# Altium PCB 电源板.PcbDoc
Units mil, origin at the board's own origin, x right, y up, seen from the top; angles counter-clockwise.
Board outline 3495 x 1305 mil, 2 copper layers (Top Layer, Bottom Layer); 24 components, 9 nets, 56 pads, 79 vias.
Unrouted connection lines stored in the file: 15.
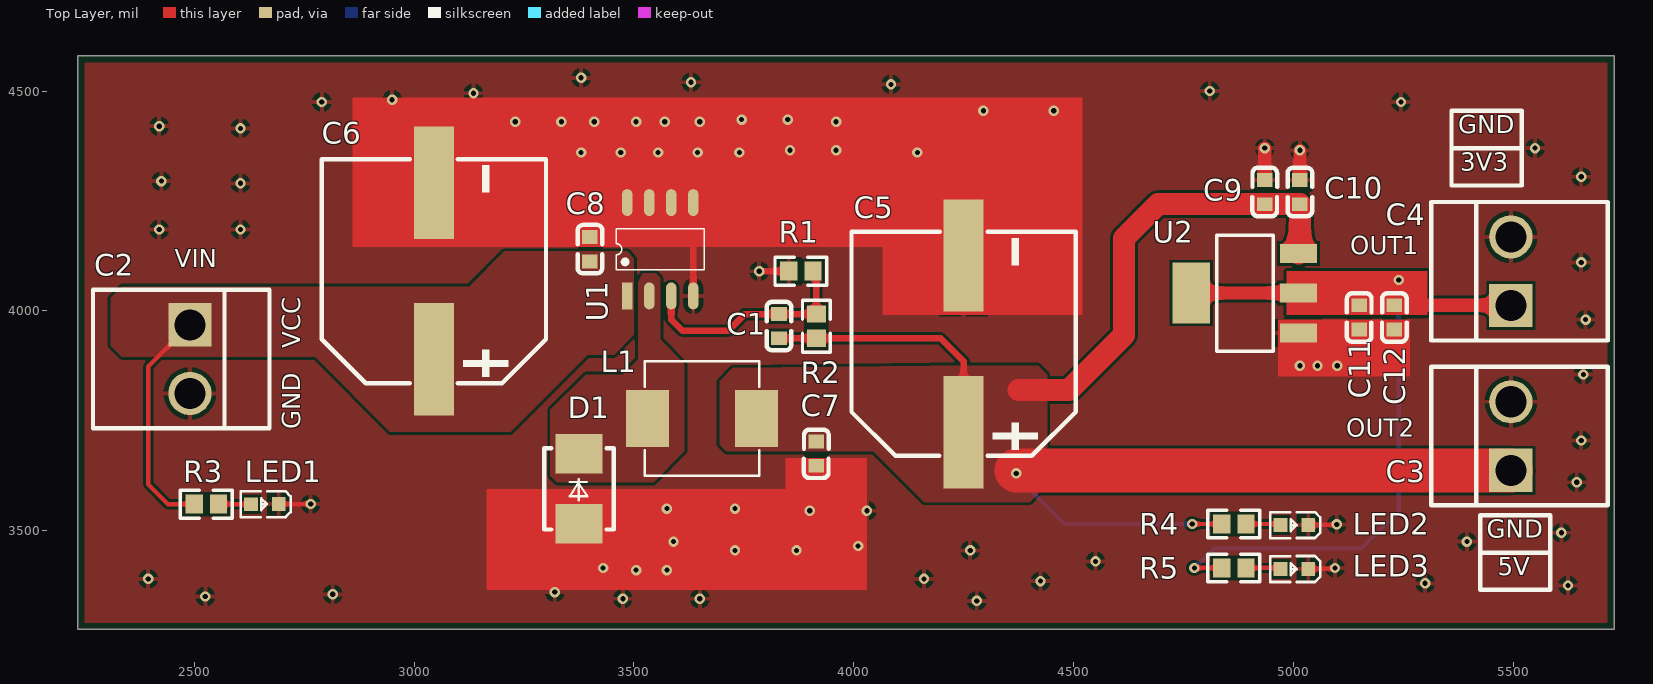
[diagram p0: Top Layer view]
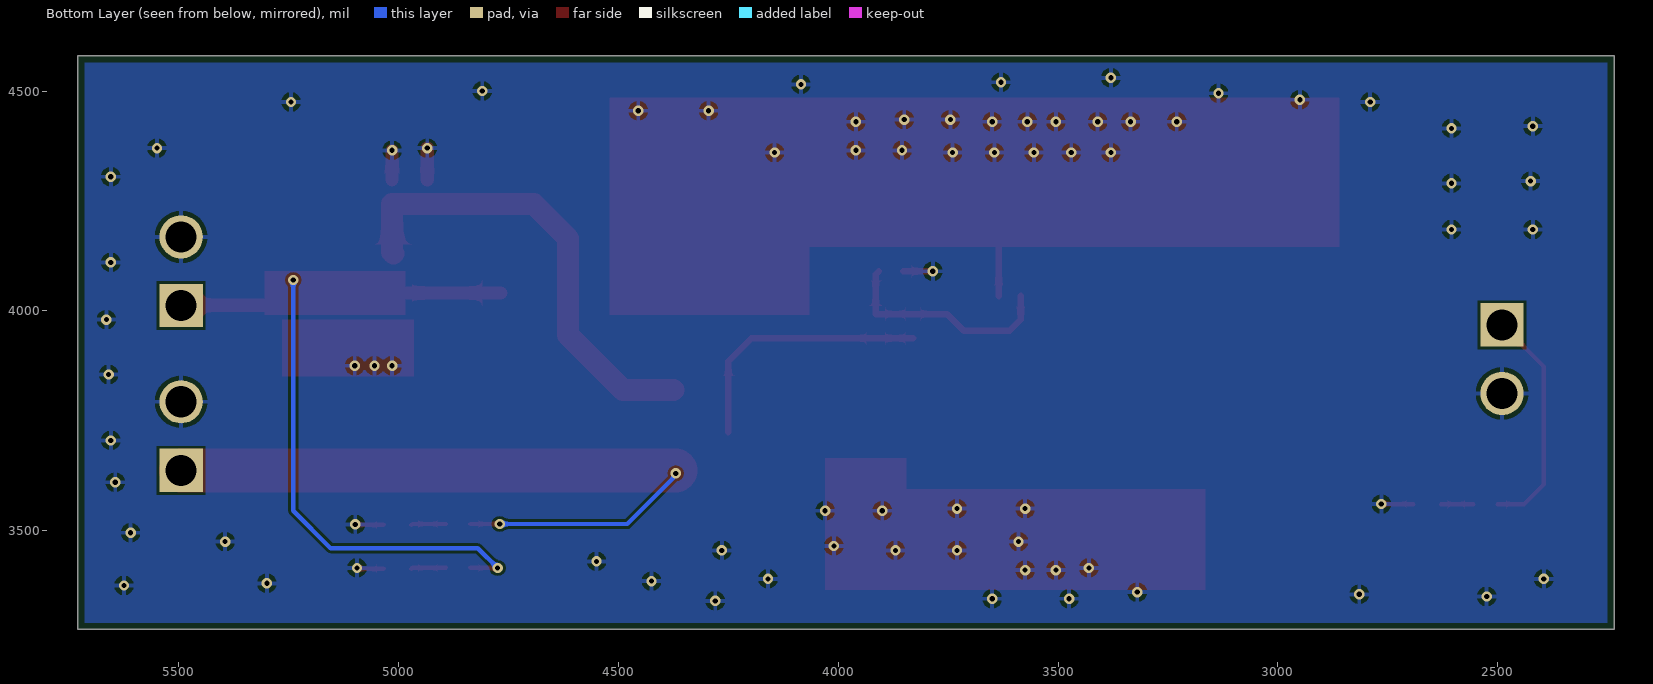
[diagram p1: Bottom Layer view, seen from below]

## Layer stack, top to bottom
Top Solder: solder mask 0.4, Solder Resist, Dk 3.5
Top Layer: signal copper 1.4
Dielectric 1: dielectric 12.6, FR-4, Dk 4.8
Bottom Layer: signal copper 1.4
Bottom Solder: solder mask 0.4, Solder Resist, Dk 3.5

## Board outline
2235,3275 5730,3275 5730,4580 2235,4580

## Design rules (kind name [scope] priority, off if disabled: settings)
BoardOutlineClearance [All] p1: gap=10 ignorepadtopadclearanceinfootprint=FALSE except(0: Arc-SplitContinuation Track-SplitContinuation SMDPad-SplitContinuation THPad-SplitContinuation Via-SplitContinuation Fill-SplitContinuation Poly-SplitContinuation Region-SplitContinuation Text-SplitContinuation; 15: Poly-OutlineEdge)
Clearance [All] p1: gap=6 ignorepadtopadclearanceinfootprint=FALSE
PolygonConnect PolygonConnect_PWR [InNetClass('pwr')] p1: connectstyle=Direct reliefconductorwidth=10 reliefentries=4 polygonreliefangle="90 Angle" airgapwidth=10
PolygonConnect [All] p2: connectstyle=Relief reliefconductorwidth=10 reliefentries=4 polygonreliefangle="90 Angle" airgapwidth=10
RoutingVias [All] p1: holewidth=28 width=50 viastyle="Through Hole" minholewidth=28 minwidth=50 maxholewidth=28 maxwidth=50
SolderMaskExpansion [All] p1: expansion=4
Width [All] p1: maxlimit=100 minlimit=10 preferedwidth=10 minimp=50.000000 maximp=50.000000 favimp=50.000000
30 further rules are at their usual default settings.

## Classes and differential pairs
net class pwr: 3V3 +5 NetD1_1 VCC

## Components (designator, comment, footprint, x,y, rotation, side; value= is the part's Value field where it differs from the comment)
C1 "3.3nF" C0603 3830,3965 r270 top
C2 "CON2" CONN-TH_2P-P3.96_3961S-2P 2490,3890 r270 top
C3 "CON2" CONN-TH_2P-P3.96_3961S-2P 5495,3715 r90 top
C4 "CON2" CONN-TH_2P-P3.96_3961S-2P 5495,4090 r90 top
C5 "470uF/50V" CAP-SMD_BD12.5-L13.0-W13.0-LS13.7-FD 4250,3925 r90 top
C6 "470uF/50V" CAP-SMD_BD12.5-L13.0-W13.0-LS13.7-FD 3045,4090 r90 top
C7 "100nF" C0603 3915,3675 r90 top
C8 "105" C0603 3400,4140 r270 top
C9 "10u" C0603 4935,4270 r270 top
C10 "0.1u" C0603 5015,4270 r270 top
C11 "10u" C0603 5150,3985 r90 top
C12 "0.1u" C0603 5230,3985 r90 top
D1 "SS34_C330487" SMB_L4.6-W3.6-LS5.3-RD 3375,3595 r270 top
L1 "47uH/2A" IND-SMD_L7.1-W6.6 3655,3755 r180 top
LED1 "" LED0603-RD 2662.44,3560 r180 top
LED2 "" LED0603-RD 5004.65,3512.59 r180 top
LED3 "" LED0603-RD 5004.65,3412.53 r180 top
R1 "1K" 0603 3880,4090 r0 top
R2 "3.1K" 0603 3915,3965 r270 top
R3 "20k" 0603 2527.44,3560 r0 top
R4 "10K" 0603 4865,3515 r0 top
R5 "4.7K" 0603 4865,3415 r0 top
U1 "XL1509-ADJ" SOP8 3560,4140 r0 top
U2 "AMS1117-3.3" SOT-223_L6.5-W3.5-P2.30-LS7.0-BR 4890,4040 r0 top

## Footprints (in the part's own frame and the unit in brackets; to place one, negate y for a bottom-side part, rotate by r counter-clockwise, add the part's x,y. Pads: shape width x height; smd on the part's side, far side on the other; paste and mask are expansions set on the pad)
0603 [mm]
  rect 1x1.1 smd: 1(-0.7,0) 2(0.7,0)
  silkscreen extent -1.5,-0.8 1.5,0.8
C0603 [mm]
  rect 0.8x0.9 smd: 1(-0.7,0) 2(0.7,0)
  silkscreen extent -1.41,-0.71 1.39,0.72
CAP-SMD_BD12.5-L13.0-W13.0-LS13.7-FD [mm]
  rect 6.5x2.3 smd: 1(-5.1,0) 2(5.1,0)
  silkscreen extent -6.48,-6.48 6.48,6.48
CONN-TH_2P-P3.96_3961S-2P [mm]
  rect 2.5x2.5 hole 1.8: 1(-1.981,0)
  round 2.5 hole 1.8: 2(1.981,0)
  silkscreen extent -4,-5.6 4,4.6
IND-SMD_L7.1-W6.6 [mm]
  rect 2.474x3.32 smd: 1(3.153,0) 2(-3.153,0)
  silkscreen extent -3.3,-3.3 3.3,3.3
LED0603-RD [mm]
  rect 0.8x0.8 smd: 1(-0.75,-0.009) 2(0.849,-0.002)
  silkscreen extent -1.44,-0.75 1.44,0.75
SMB_L4.6-W3.6-LS5.3-RD [mm]
  rect 2.29x2.72 smd: 1(-2.025,0) 2(2.025,0)
  silkscreen extent -2.35,-2 2.35,2
SOP8 [mil]
  rect 24x61 smd: 1(-75,-106.3)
  oval 24x61 smd: 2(-25,-106.3) 3(25,-106.3) 4(75,-106.3) 5(75,106.3) 6(25,106.3) 7(-25,106.3) 8(-75,106.3)
  silkscreen extent -100,-47 100,47
SOT-223_L6.5-W3.5-P2.30-LS7.0-BR [mil]
  rect 85x43 smd: 1(122,-90.5) 2(122,0.5) 3(122,90.5)
  rect 85x138 smd: 4(-122,0.5)
  silkscreen extent -64,-132 64,132

## Part data
C1: BOM_Manufacturer="Guangdong Fenghua Advanced Tech", BOM_Manufacturer Part=0603CG332J500NT, BOM_Supplier=LCSC, BOM_Supplier Part=C190576, Contributor=LCSC, nameAlias=Capacitance, spicePre=C, spiceSymbolName=0603CG332J500NT
C5 C6: library part 470uF/35V, LatestRevisionDate=17-Jul-2002, LatestRevisionNote="Re-released for DXP Platform.", PackageDescription="Polarized Capacitor (Radial); 2 Leads", PackageReference=RB7.6-15, Published=8-Jun-2000, Publisher="Altium Limited"
C7: BOM_Manufacturer=WTC, BOM_Manufacturer Part=0603B104K160, BOM_Supplier=LCSC, BOM_Supplier Part=C80516, nameAlias=Capacitance, spicePre=C, spiceSymbolName=0603B104K160
C8: library part 100nF, BOM_Manufacturer=WTC, BOM_Manufacturer Part=0603B104K160, BOM_Supplier=LCSC, BOM_Supplier Part=C80516, nameAlias=Capacitance, spicePre=C, spiceSymbolName=0603B104K160
D1: BOM_Manufacturer=LGE, BOM_Manufacturer Part=SS34, BOM_Supplier=LCSC, BOM_Supplier Part=C330487, Contributor=LCSC, spicePre=D, spiceSymbolName=SS34_C330487
LED1 LED2 LED3: library part TJ-S1608CY6T5ALC6B-A5
R1 R2: BOM_Manufacturer=YAGEO, BOM_Manufacturer Part=RC0603FR-071KL, BOM_Supplier=LCSC, BOM_Supplier Part=C22548, nameAlias="Resistance (Ohms)", spicePre=R, spiceSymbolName=RC0603FR-071KL
R3 R4 R5: library part 3.1K, BOM_Manufacturer=YAGEO, BOM_Manufacturer Part=RC0603FR-071KL, BOM_Supplier=LCSC, BOM_Supplier Part=C22548, nameAlias="Resistance (Ohms)", spicePre=R, spiceSymbolName=RC0603FR-071KL
U2: BOM_LCSC Assembly=Yes, BOM_Manufacturer=AMS, BOM_Manufacturer Part=AMS1117-3.3, BOM_Supplier=LCSC, BOM_Supplier Part=C6186, Contributor=haohan123, image=//image.lceda.cn/szlcsc/C6186.jpg, SMT Type=Basic, sourceId=dwIGgezVh, spicePre=U, spiceSymbolName=AMS1117-3.3, timeStamp=1476261164
C9 C10 C11 C12: Contributor=LCEDA_Lib, nameAlias=Value(F), spicePre=C, spiceSymbolName=C_0603_US
L1: Code_IEC=1005, Code_JEITA=0402, LatestRevisionDate=29-May-2009, LatestRevisionNote="IPC-7351 Footprint Added.", PackageDescription="Chip Inductor", PackageReference=0402-A, Publisher="Altium Limited"
U1: Contributor=XYCWJ, spicePre=U, spiceSymbolName=XL1509-ADJ

## Via types
v1: diameter 23.62, hole 11.81, Top Layer to Bottom Layer, 79 vias

## Nets (pads, with @x,y where several pads share a name; then routed paths per layer and width w, separated by ;. In a path a pad name is that pad's centre, name@x,y a point inside that pad or via, vN(x,y) a via of type N, cw(c..) or ccw(c..) an arc to the next point about the centre after c; other vN are vias at no path point)
3V3: C4.1 C11.2 C12.2 R5.1 U2.2 U2.4 | length 1846.2
  Top Layer w10: v1(4775,3415) R5.1
  Top Layer w30: U2.4 U2.2 5122.06,4040.5 5147.28,4015.27 5147.28,4013.3 5148.03,4012.55 C11.2 C12.2 5494.44,4012.55 C4.1
  Bottom Layer w10: v1(4775,3415) 4820,3460 5155,3460 5240,3545 v1(5240,4070)
+5: C1.2 C3.1 C5.1 C7.2 C9.2 C10.2 L1.2 R2.2 R4.1 U2.3 | length 3302.6
  Top Layer w10: v1(4770,3515) R4.1
  Top Layer w15: C1.2 R2.2 4197.56,3937.44 4250,3885 C5.1
  Top Layer w50: 4375,3820 4490,3820 4615,3945 4615,4165 4692.44,4242.44 C9.2 C10.2 5015,4133.5 U2.3
  Top Layer w100: v1@4370,3637 C3.1
  Bottom Layer w10: v1(4370,3630) 4370,3626.31 4376.46,3619.86 4376.46,3618.54 4480,3515 v1(4770,3515)
GND: C2.2 C3.2 C4.2 C5.2 C6.2 C7.1 C8.1 C9.1 C10.1 C11.1 C12.1 D1.2 LED1.1 LED2.1 LED3.1 R1.1 U1.4 U1.5 U1.6 U1.7 U1.8 U2.1 | length 540.2
  Top Layer w10: LED1.1 v1(2764.65,3560.35) v1@2765,3560 ; LED3.1 5092.88,3412.88 v1(5095,3415) ; LED2.1 5097.93,3512.93 v1@5100,3515
  Top Layer w15: U1.4 3635,4165 ; v1(3785,4090) R1.1
  Top Layer w30: C9.1 v1(4935,4370) ; C10.1 v1(5015,4365)
  other v1: 4280,3340 3475,3345 3650,3345 2525,3350 2815,3355 3320,3360 5625,3375 5300,3380 4425,3385 2395,3390 4160,3390 3505,3410 3575,3410 3430,3415 4550,3430 3730,3455 3870,3455 4265,3455 4010,3465 3590,3475 5395,3475 5610,3495 5098.97,3513.97 3900,3545 4030,3545 3575,3550 3730,3550 5645,3610 5655,3705 5660,3855 5015,3875 5055,3875 5100,3875 5665,3980 5655,4110 2420,4185 2605,4185 2605,4290 2425,4295 5655,4305 3380,4360 3470,4360 3555,4360 3645,4360 3740,4360 4145,4360 3855,4365 3960,4365 5550,4370 2605,4415 2420,4420 3230,4430 3335,4430 3410,4430 3505,4430 3570,4430 3650,4430 3960,4430 3745,4435 3850,4435 4295,4455 4455,4455 2790,4475 5245,4475 2950,4480 3135,4495 4810,4500 4085,4515 3630,4520 3380,4530
NetC1_1: C1.1 R1.2 R2.1 U1.3 | length 510.1
  Top Layer w15: U1.3 3585,3980 3610,3955 3715,3955 3752.55,3992.55 C1.1 R2.1 3915,4082.56 R1.2
NetD1_1: D1.1 L1.1 U1.2
NetLED1_2: LED1.2 R3.2 | length 74
  Top Layer w10: R3.2 2628.94,3560 LED1.2
NetLED2_2: LED2.2 R4.2 | length 79.6
  Top Layer w10: R4.2 4968.88,3515 LED2.2
NetLED3_2: LED3.2 R5.2 | length 79.7
  Top Layer w10: R5.2 4968.82,3415 LED3.2
VCC: C2.1 C6.1 C8.2 R3.1 U1.1 | length 525.9
  Top Layer w10: C2.1 2395,3873 2395,3605 2440,3560 R3.1

## Polygon pours and split planes (outlines as drawn)
GND on Top Layer "Top Layer-No Net" (solid, remove dead copper, pour order 12): 2345,4935 1895,4485 1895,2950 2160,2685 6020,2685 6020,3660 6420,4060 5675,4805
+5 on Top Layer "Top Layer-No Net" (solid, remove dead copper, pour order 4): 3725,3870 3695,3840 3695,3695 3710,3680 4045,3680 4160,3565 4400,3565 4440,3605 4440,3855 4420,3875 4175,3875
NetD1_1 on Top Layer "Top Layer-No Net" (solid, remove dead copper, pour order 2): 3520,4085 3515,4075 3510,4065 3510,3890 3475,3855 3390,3855 3310,3775 3310,3625 3325,3610 3545,3610 3615,3680 3615,3880 3560,3935 3560,4075 3550,4085
VCC on Top Layer "Top Layer-No Net" (solid, remove dead copper, pour order 0): 3500,4120 3485,4135 3205,4135 3125,4055 2335,4055 2310,4030 2310,3920 2335,3895 2775,3895 2945,3725 3220,3725 3395,3900 3455,3900 3500,3945
GND on Bottom Layer "Top Layer-No Net" (solid, remove dead copper, pour order 10): 2360,4925 1910,4475 1910,2940 2175,2675 6035,2675 6035,3650 6435,4050 5690,4795

## Other copper
Top Layer:
  rectangle net 3V3: 4985,3990 5305,4090
  rectangle net GND: 4965,3850 5265,3980
  rectangle net GND: 4065,3990 4520,4305
  rectangle net GND: 3845,3520 4030,3665
  rectangle net GND: 3165,3365 4030,3595
  rectangle net GND: 2860,4145 4520,4485

## Silkscreen, mask and mechanical layers (free items; w line width, h text height)
Top Overlay:
  lines w10: 5360,4370 5515,4370 ; 5425,3450 5580,3450 ; 5360,4285 5520,4285 5520,4455 5360,4455 5360,4285 ; 5425,3365 5425,3535 5585,3535 5585,3365 5425,3365
  text "GND" at 5375,4390 h70
  text "3V3" at 5380,4305 h70
  text "OUT1" at 5130,4115 h70
  text "VIN" at 2455,4085 h70
  text "VCC" at 2755,3915 h70 r90
  text "GND" at 2755,3730 h70 r90
  text "OUT2" at 5120,3700 h70
  text "GND" at 5440,3470 h70
  text "5V" at 5465,3385 h70
Mechanical 1:
  the board outline again, w50